# Altium PCB PCB1.PcbDoc
Units mil, origin at the board's own origin, x right, y up, seen from the top; angles counter-clockwise.
Board outline 2165 x 1540 mil, 2 copper layers (Top Layer, Bottom Layer); 7 components, 6 nets, 16 pads, 0 vias.
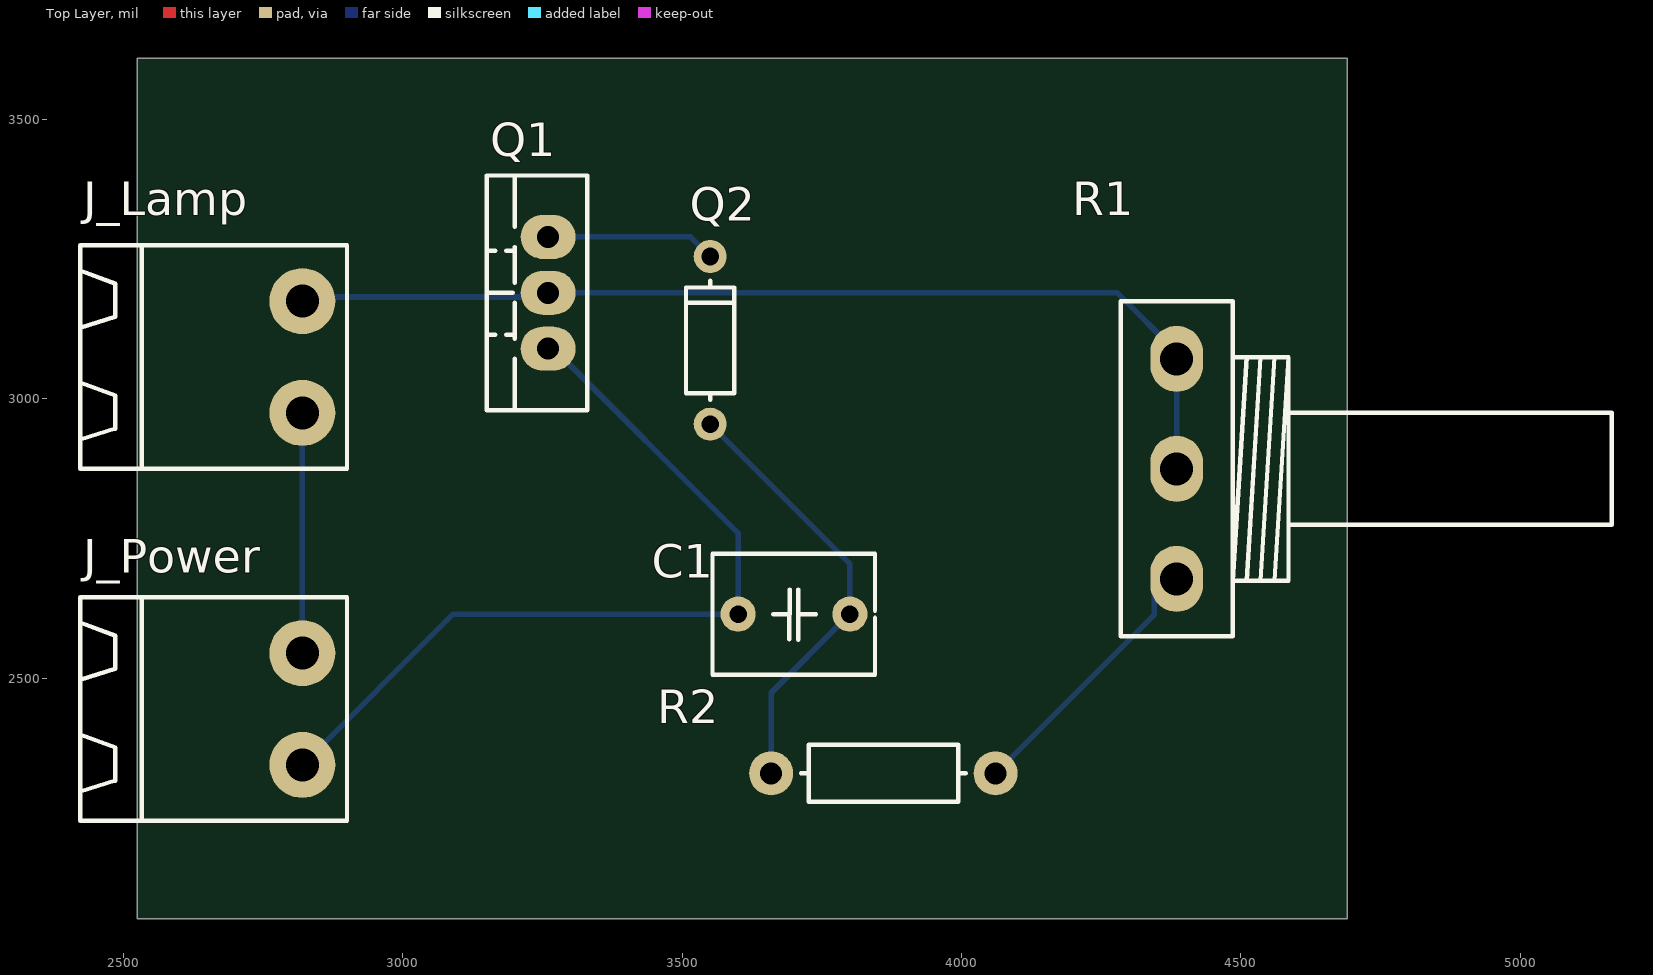
[diagram p0: Top Layer view]
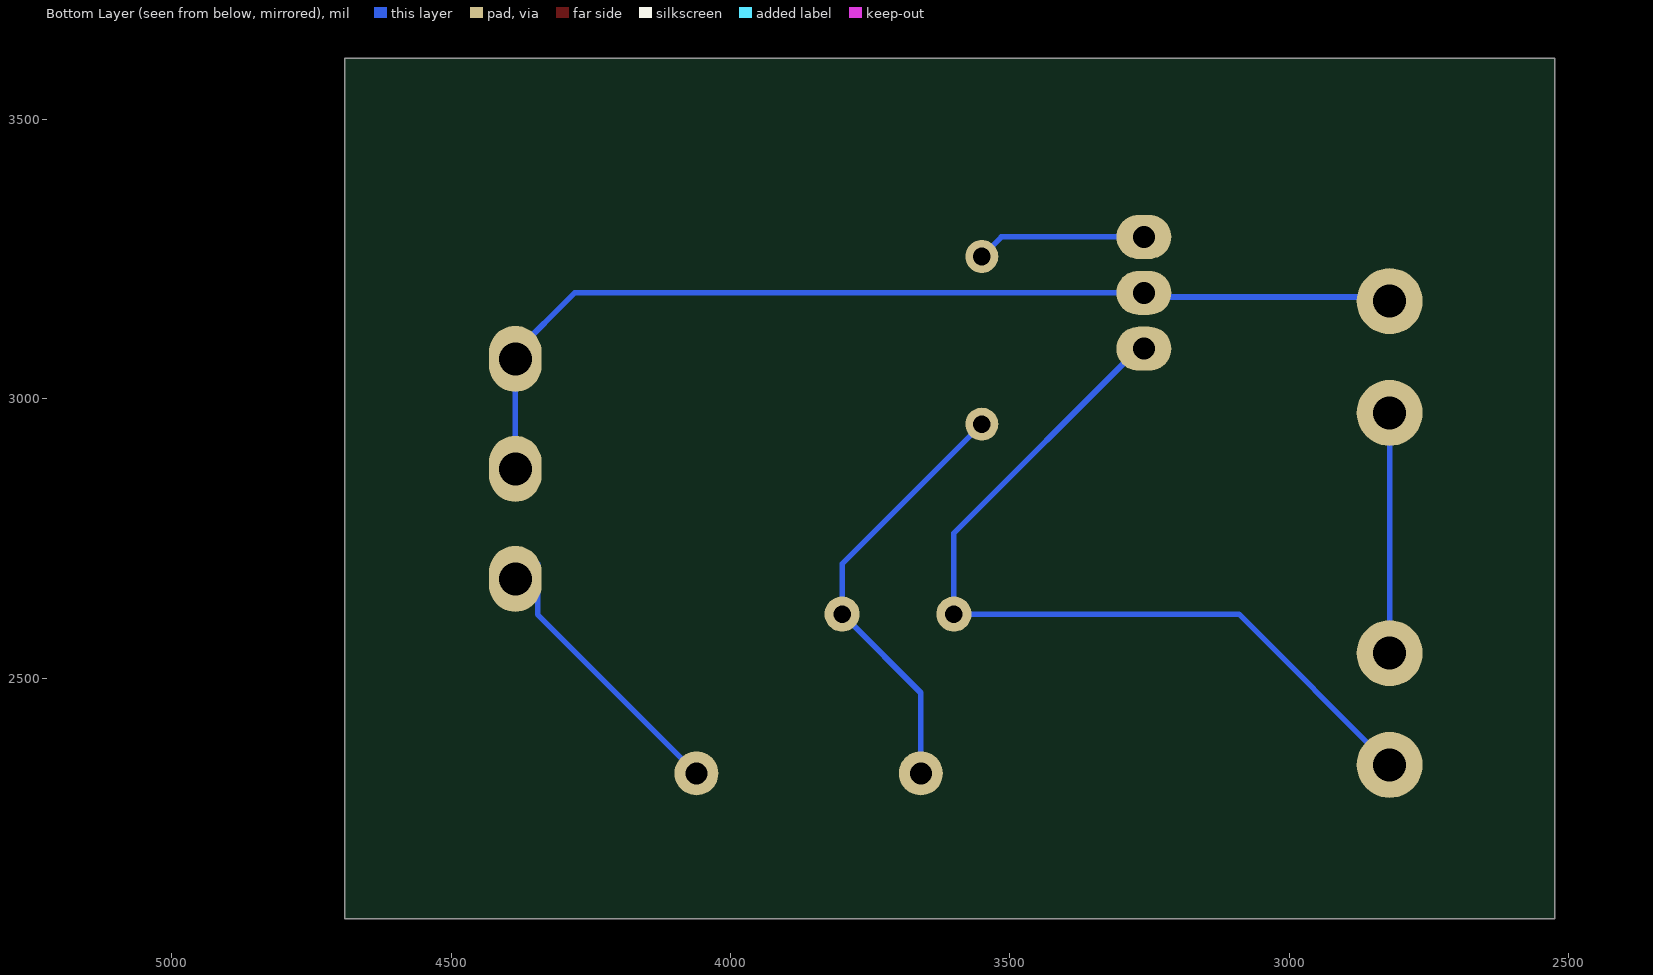
[diagram p1: Bottom Layer view, seen from below]

## Layer stack, top to bottom
Top Solder: solder mask 0.4, Solder Resist, Dk 3.5
Top Layer: signal copper 1.4
Dielectric 1: dielectric 12.6, FR-4, Dk 4.8
Bottom Layer: signal copper 1.4
Bottom Solder: solder mask 0.4, Solder Resist, Dk 3.5

## Board outline
2525,2070 4690,2070 4690,3610 2525,3610

## Design rules (kind name [scope] priority, off if disabled: settings)
Clearance [All] p1: gap=10 ignorepadtopadclearanceinfootprint=FALSE
PolygonConnect [All] p1: connectstyle=Relief reliefconductorwidth=10 reliefentries=4 polygonreliefangle="90 Angle" airgapwidth=10
RoutingVias [All] p1: holewidth=28 width=50 viastyle="Through Hole" minholewidth=28 minwidth=50 maxholewidth=28 maxwidth=50
SolderMaskExpansion [All] p1: expansion=4 istentingtop=FALSE
Width [All] p1: maxlimit=10 minlimit=10 preferedwidth=10
30 further rules are at their usual default settings.

## Components (designator, comment, footprint, x,y, rotation, side; value= is the part's Value field where it differs from the comment)
J_Lamp "CONN_TB2" MSTB_2 2820,3075 r90 top
J_Power "CONN_TB2" MSTB_2 2820,2445 r90 top
Q1 "BTA12" TO220_3 3260,3190 r90 top
Q2 "DB3" D_AX03_DO35 3550,3105 r90 top
R1 "POT10K" VOL_R 4385,2875 r270 top
? "68nF" C_FLM_7X5H11 3700,2615 r180 top
? "3.3K" R025W_AX04 3860,2330 r180 top

## Footprints (in the part's own frame and the unit in brackets; to place one, negate y for a bottom-side part, rotate by r counter-clockwise, add the part's x,y. Pads: shape width x height; smd on the part's side, far side on the other; paste and mask are expansions set on the pad)
C_FLM_7X5H11 [mm] "Capacitor, THT, Metallized Polyester Film with 7.2x5.5x11.5mm LxTxH"
  round 1.6 hole 0.8: 1(-2.54,0) 2(2.54,0)
  silkscreen extent -3.68,-2.75 3.7,2.75, body extent -3.6,-2.75 3.6,2.75, height 11.5
D_AX03_DO35 [mm] "DIODE 0.3 INCH SPACING DO35"
  round 1.5 hole 0.8: 1(-3.81,0) 2(3.81,0)
  silkscreen extent -2.71,-1.1 2.71,1.1, body extent -4.09,-0.96 4.09,0.96, height 1.96
MSTB_2 [mm] "PHOENIX MSTB 2, 5-G, 5.08mm pitch, 2pin"
  round 3 hole 1.5: 1(-2.54,0) 2(2.54,0)
  silkscreen extent -5.08,-2.03 5.08,10.1, body extent -5,-2 5,10, height 8.7
R025W_AX04 [mm] "RESISTOR 1/4 WATT, AXIAL0.4"
  round 2 hole 1: 1(-5.1,0) 2(5.1,0)
  silkscreen extent -3.75,-1.3 3.75,1.3, body extent -5.38,-1.28 5.38,1.28, height 2.6
TO220_3 [mm] "TO-220 3 LEAD, TO-262, pitch: 2.54mm  10x4.5mm"
  oval 2x2.5 hole 1: 1(-2.54,0) 2(0,0) 3(2.54,0)
  silkscreen extent -5.33,-1.78 5.33,2.79, body extent -5.2,-1.85 5.2,2.65, height 19
VOL_R [mm] "VOULME RIGHT ANGLE"
  oval 3x2.4 hole 1.5: 1(-5,0) 2(0,0) 3(5,0)
  silkscreen extent -7.62,-2.54 7.62,19.78, body extent -10.76,-5 10.93,27.8, height 24.54

## Part data
J_Lamp J_Power: library part CONN_MSTB_2, "CONN, PHOENIX MSTB, 5-G, 5.08mm pitch", PARAM=12A, PARAM2=320V
Q1: library part TRIAC_BTA12-600_TO220, "Triac, 600V, 12A, TO-220", MANF=ST, MANF_P#="BTA12-600BW, BTA12-600CW, BTA12-600TW", PRICE=1200toman@PAYA
Q2: library part DIAC_DB3_DO35, "Diac, 32VBO, DO-35", MANF=ST, MANF_P#=DB3, PARAM="2A, -40~125oC", PARAM2=32VBO, PRICE=toman@PAYA
R1: library part RES_THD_POT_VOLUME, "RESISTOR, THD, Potentiometer Volume"
?: library part CAP_THD_FLM, "CAP, THD, FILM,", ASSEMBLY=ASSEMBLY, DESC=DESCRIPTION, DIST#=MOUSER, MANF=MANF, MANF_P#=MANF_PART#, PARAM=20%, PARAM2=25V, PRICE="10= 5$"
?: library part RES_THD, "RESISTOR, THD", ASSEMBLY=ASSEMBLY, DESC=DESCRIPTION, DIST#=MOUSER, MANF="KOA SPEER", MANF_P#=RK73H1ETTP4701F, PARAM=0.063W, PARAM2=1%, PRICE="100= 0.5$"

## Nets (pads, with @x,y where several pads share a name; then routed paths per layer and width w, separated by ;. In a path a pad name is that pad's centre, name@x,y a point inside that pad or via, vN(x,y) a via of type N, cw(c..) or ccw(c..) an arc to the next point about the centre after c; other vN are vias at no path point)
L_Line: J_Lamp.1 J_Power.2 | length 414.1
  Bottom Layer w10: J_Lamp.1@2810,2955 2820,2945 J_Power.2
N_Line: ?.2@3600,2615 J_Power.1 Q1.1 | length 1520.6
  Bottom Layer w10: J_Power.1 3090,2615 3605,2615 ?.2@3610,2620 ; Q1.1@3270,3095 3270,3089.84 3600,2759.84 ?.2@3600,2615
"Net _1": ?.1@4060.79,2330 R1.3 | length 492.7
  Bottom Layer w10: ?.1@4060.79,2330 4345,2614.21 R1.3@4345,2705
"Net _2": ?.1@3800,2615 ?.2@3659.21,2330 Q2.1 | length 779.8
  Bottom Layer w10: Q2.1 3800,2705 3800,2635 ?.1@3795,2630 ; ?.2@3659.21,2330 3659.21,2474.21 3790,2605 ?.1@3790,2625
NetJ_Lamp_2: J_Lamp.2 Q1.2 R1.1 R1.2 | length 1810.1
  Bottom Layer w10: J_Lamp.2 2827.5,3182.5 3242.5,3182.5 Q1.2@3260,3200 ; Q1.2@3280,3195 3285,3190 4278.66,3190 4385,3083.66 R1.1 R1.2
NetQ1_3: Q1.3 Q2.2 | length 302.4
  Bottom Layer w10: Q1.3 3515,3290 3545,3260 Q2.2@3550,3260

## Silkscreen, mask and mechanical layers (free items; w line width, h text height)
Top Overlay:
  text "C1" at 3445,2680 h60
  text "R2" at 3455,2420 h60